# Altium PCB 219-05-2268.PcbDoc
Units mil, origin at the board's own origin, x right, y up, seen from the top; angles counter-clockwise.
Board outline 1800 x 1650 mil, 2 copper layers (Top Layer, Bottom Layer), stack 61.855 mil thick; 17 components, 11 nets, 65 pads, 6 vias.
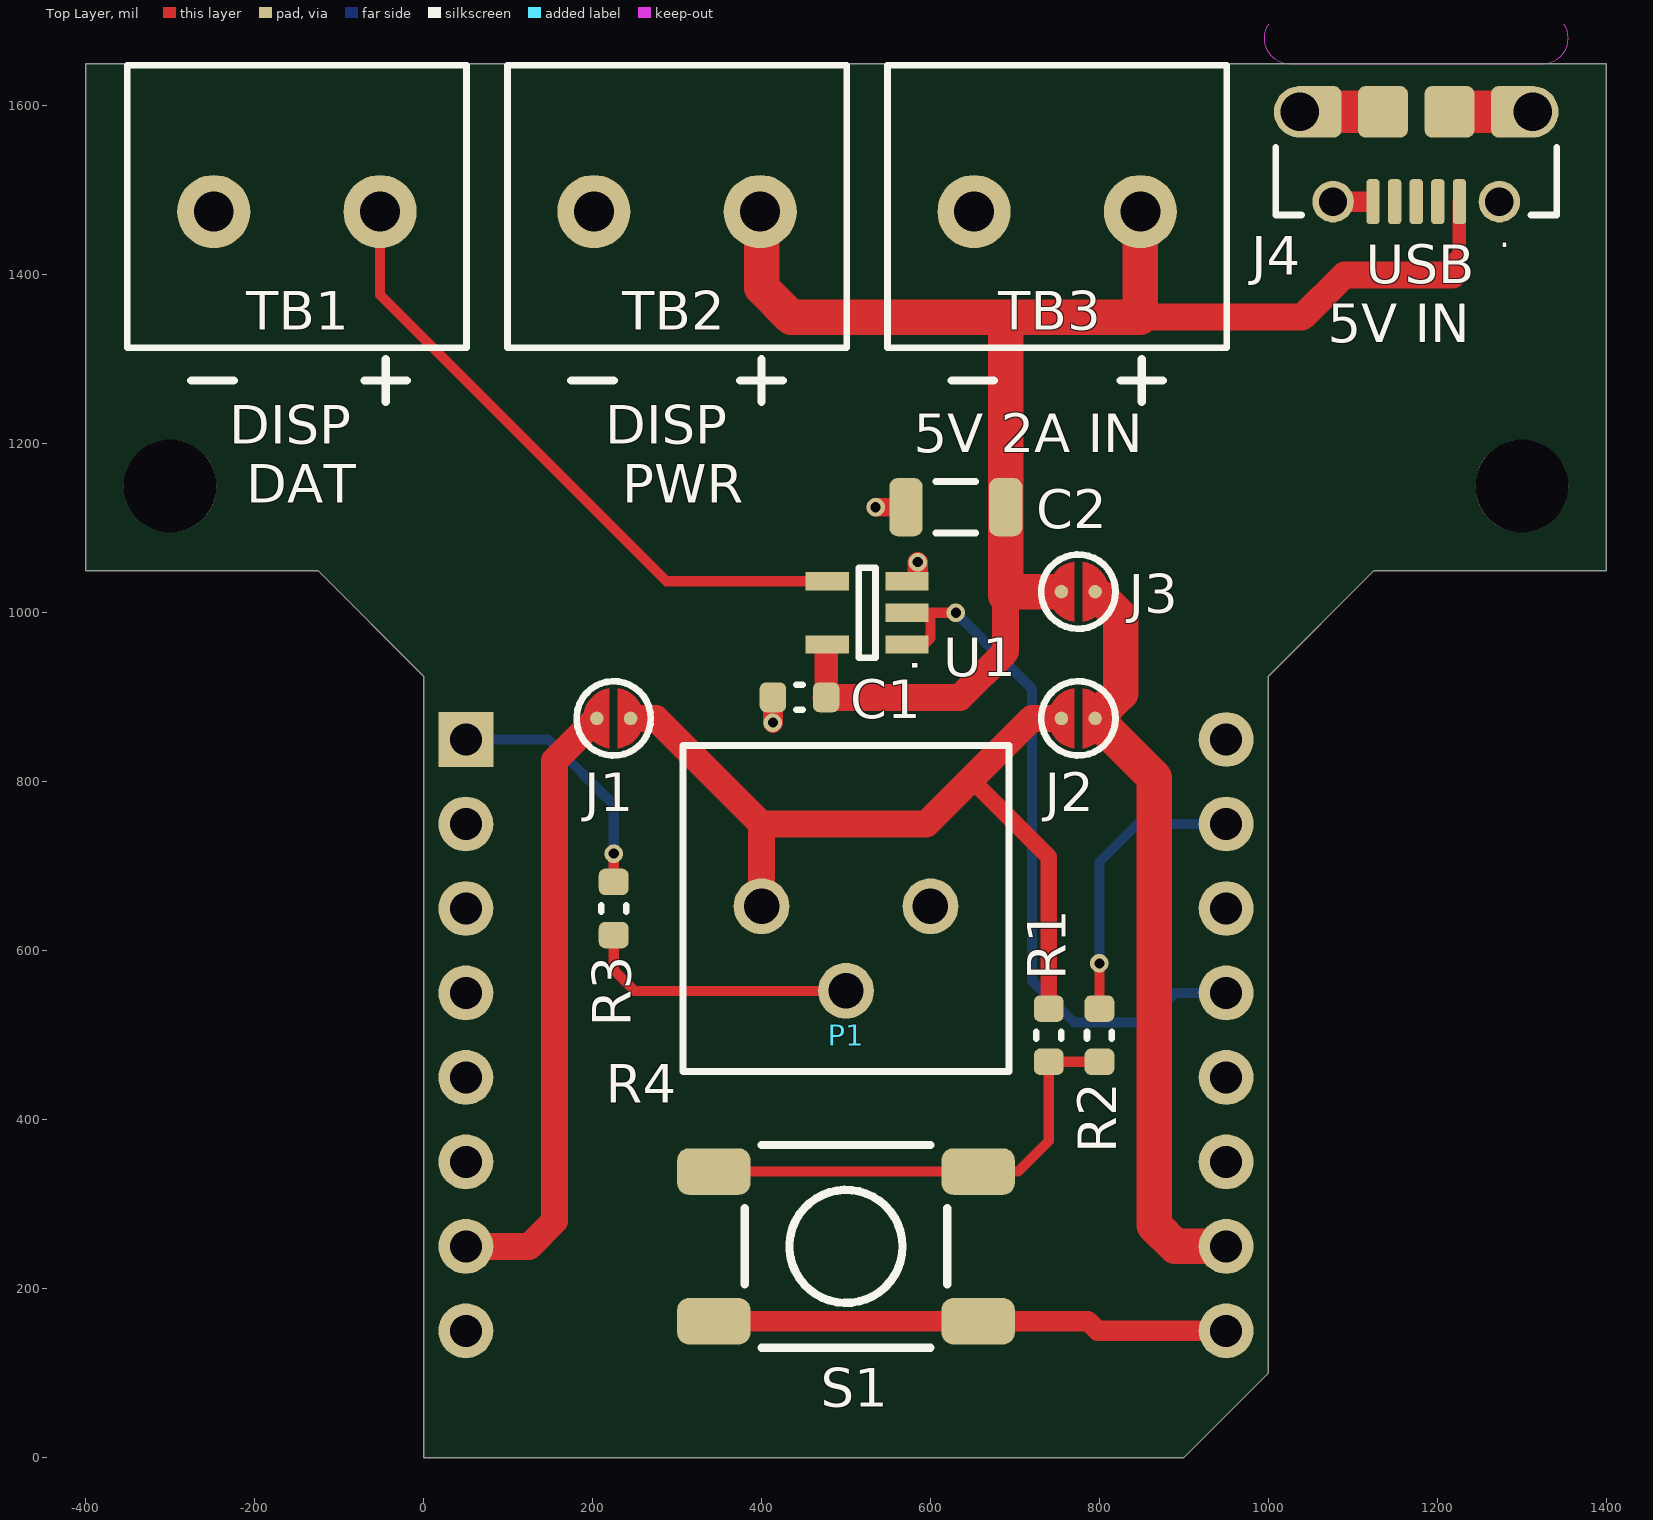
[diagram p0: Top Layer view]
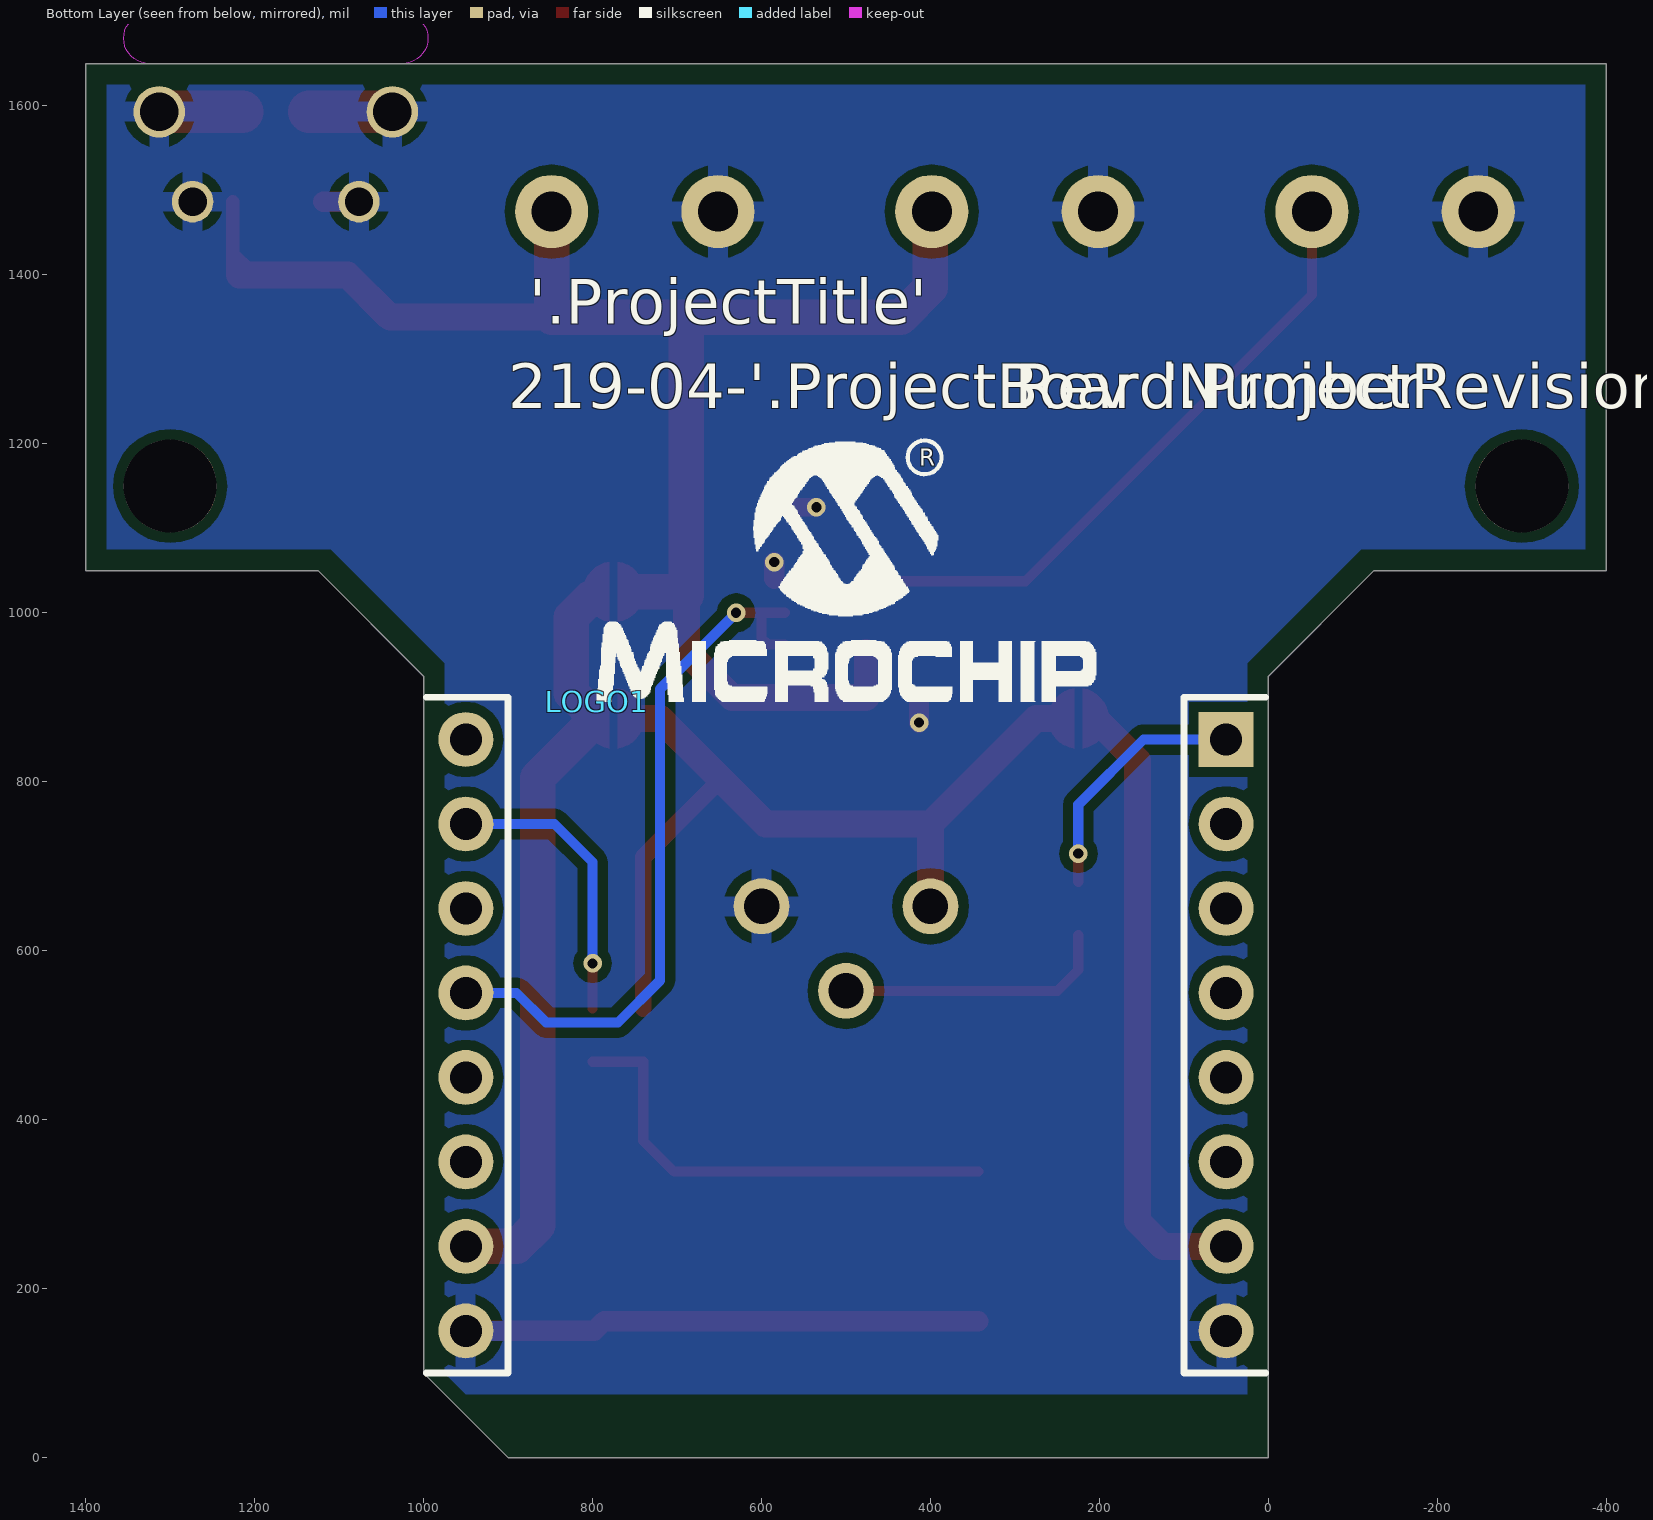
[diagram p1: Bottom Layer view, seen from below]
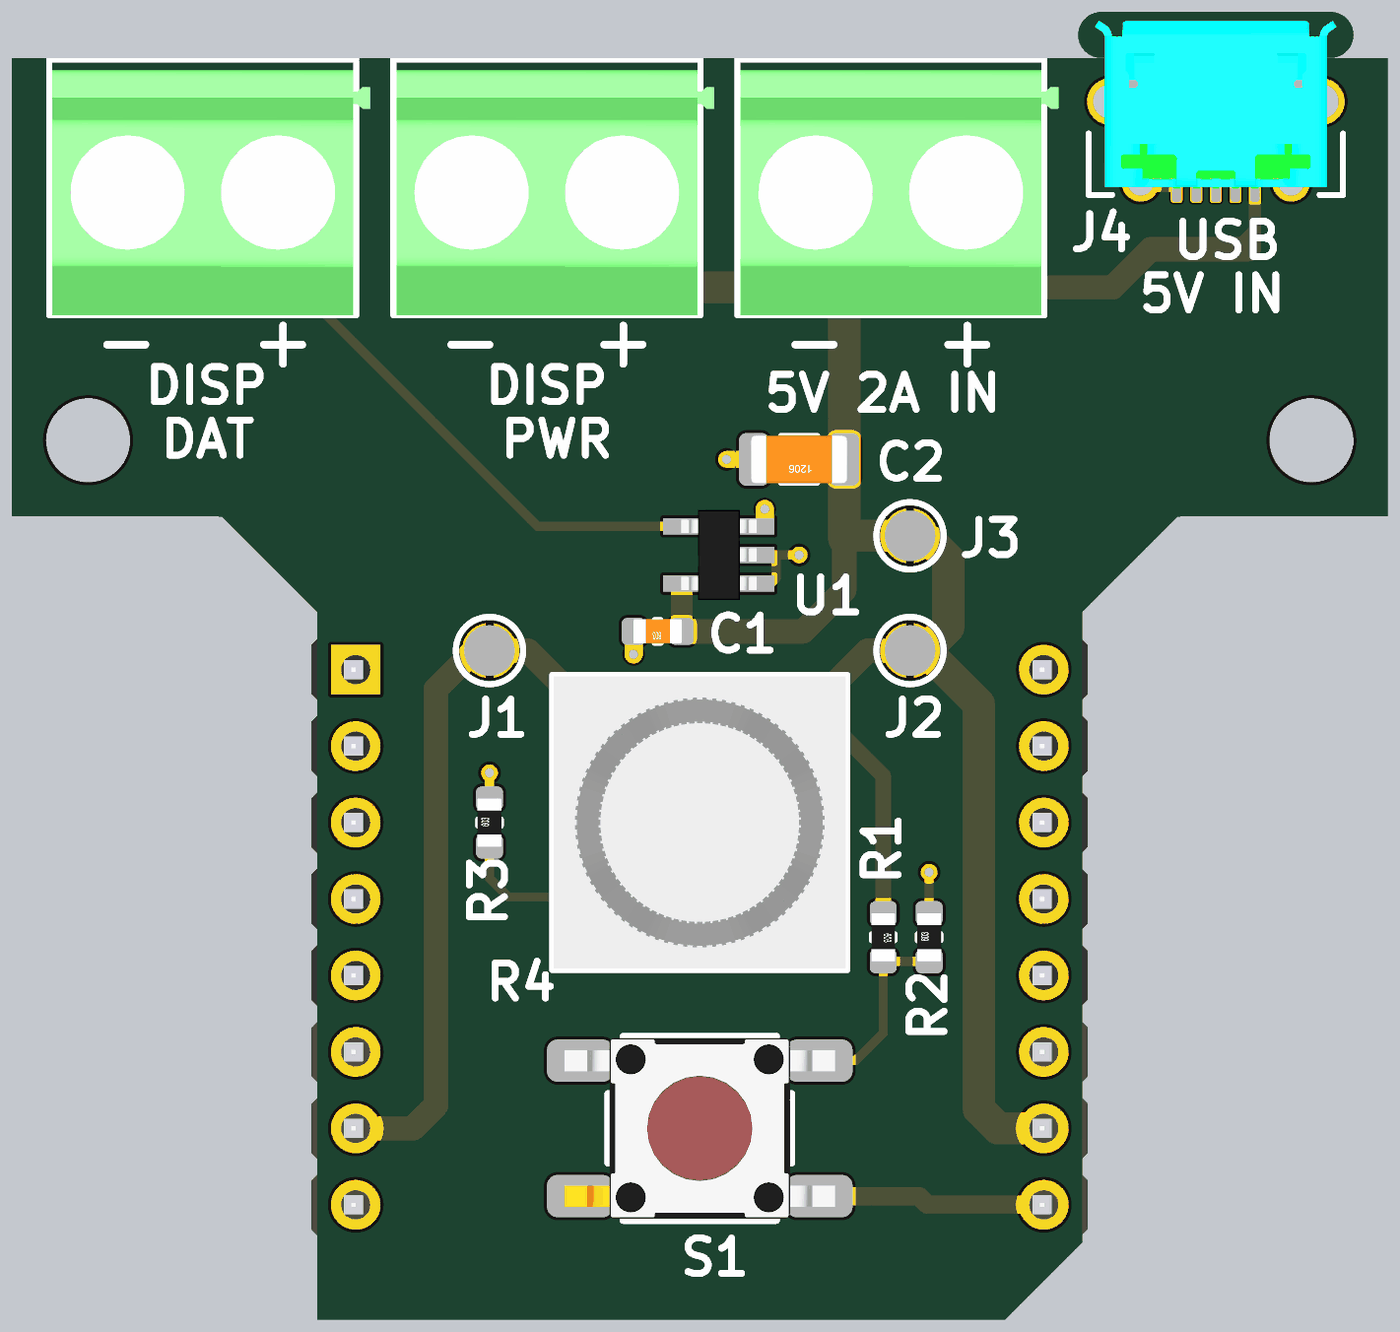
[diagram p2: 3D render of the assembled board from above, using the file's embedded part models]

## Layer stack, top to bottom
Top Solder: solder mask 0.4, Solder Resist, Dk 3.5
Top Layer: signal copper 1.4
Dielectric1: core 59.0551, FR-4, Dk 4.8
Bottom Layer: signal copper 1.4
Bottom Solder: solder mask 0.4, Solder Resist, Dk 3.5

## Board outline
0,925 -125,1050 -400,1050 -400,1650 1400,1650 1400,1050 1125,1050 1000,925 1000,100 900,0 0,0

## Design rules (kind name [scope] priority, off if disabled: settings)
Clearance "Net to Polygon 0.5mm" [InNet('5V') vs (IsRegion)] p1 off: gap=19.68 ignorepadtopadclearanceinfootprint=FALSE except(0: Arc-Hole Track-Hole SMDPad-Hole THPad-Hole Via-Hole Fill-Hole Poly-Hole Region-Hole Text-Hole)
Clearance [All] p2: gap=8 ignorepadtopadclearanceinfootprint=FALSE except(0: Arc-Hole Track-Hole SMDPad-Hole THPad-Hole Via-Hole Fill-Hole Poly-Hole Region-Hole Text-Hole; 5: Arc-Text Track-Text SMDPad-Text THPad-Text Via-Text Fill-Text Poly-Text Region-Text Text-Text; 6: Arc-SMDPad Track-SMDPad SMDPad-SMDPad; 12: Arc-Poly Track-Poly SMDPad-Poly THPad-Poly Via-Poly Fill-Poly Poly-Poly)
ComponentClearance [All] p1: gap=0 collisioncheckmode=3 verticalgap=0 showdistances=FALSE
DiffPairsRouting [All] p1: maxlimit=9 minlimit=9 mostfreqgap=9 toplayer_minwidth=9 toplayer_maxwidth=9 toplayer_prefwidth=9 bottomlayer_minwidth=9 bottomlayer_maxwidth=9 bottomlayer_prefwidth=9 maxuncoupledlength=500
FabricationTestPointUsage TestPointUsage [All] p1: valid=0 allowmultiple=FALSE
FabricationTestpoint Testpoint [All] p1: side=3 testpointundercomponent=TRUE minsize=40 maxsize=100 preferedsize=60 minholesize=0 maxholesize=40 preferedholesize=32 testpointgrid=1 allowsidetop=TRUE allowsidebottom=TRUE usegrid=TRUE gridtolerance=0.01
HoleSize [All] p1: absolutevalues=TRUE maxlimit=196.85 minlimit=11.81 maxpercent=80.000 minpercent=20.000
HoleToHoleClearance [All] p1: gap=11.81 allowstackedmicrovias=TRUE
MinimumSolderMaskSliver [All] p1 off: minsoldermaskwidth=7.87
PlaneClearance [All] p1: clearance=19.68
PlaneConnect PlaneConnect_full [IsVia] p1: planeconnectstyle=Direct reliefexpansion=19.68 reliefentries=4 reliefconductorwidth=11.81 reliefairgap=11.81
PlaneConnect [All] p2: planeconnectstyle=Relief reliefexpansion=11.81 reliefentries=4 reliefconductorwidth=9.84 reliefairgap=9.84
PolygonConnect PolygonConnect_full [All vs IsVia or IsNamedPolygon('full')] p1: connectstyle=Direct reliefconductorwidth=0 reliefentries=4 polygonreliefangle="90 Angle" airgapwidth=10
PolygonConnect [All] p2: connectstyle=Relief reliefconductorwidth=24 reliefentries=4 polygonreliefangle="90 Angle" airgapwidth=12
RoutingVias [All] p1: holewidth=15 width=30 viastyle="Through Hole" minholewidth=12 minwidth=22 maxholewidth=21 maxwidth=42
ShortCircuit [IsNet] p1: allowed=FALSE
SilkToBoardRegionClearance [All] p1 off:
SilkToSilkClearance [All] p1 off: silktosilkclearance=7.87
SilkToSolderMaskClearance SilkscreenOverComponentPads [IsPad] p1 off: minsilkscreentomaskgap=7.87 clearancetoexposedcopper=TRUE
SolderMaskExpansion [All] p1: expansion=3.94
Width [All] p1: maxlimit=100 minlimit=8 preferedwidth=12 checkconnectedcopper=TRUE
17 further rules are at their usual default settings.

## Components (designator, comment, footprint, x,y, rotation, side; value= is the part's Value field where it differs from the comment)
C1 "Capacitor NP" CAP_C_0603 445,900 r180 top value=0.1uF
C2 "Capacitor NP" CAP_C_1206 630,1125 r180 top value=10uF
J1 "JMPR_Solder" JMPR_SOLDER 225,875 r0 top
J2 "JMPR_Solder" JMPR_SOLDER 775,875 r180 top
J3 "JMPR_Solder" JMPR_SOLDER 775,1025 r180 top
J4 "CON USB2.0 Mini_Micro" CON_USB_Micro-AB_SMD_TH_RA_FCI_10118194-0001LF 1175,1593 r0 top locked value="USB2.0 MICRO-B"
LOGO1 "Logo_MCHP_Small" LOGO_MCHP_SMALL 795,895 r180 bottom
P1 "Module mikroBUS_Add-on_standard" MOD_mikroBUS_MINI 0,0 r0 top locked value=mikroBUS_Small
R1 "Resistor" RES_C_0603 740,500 r270 top value=10k
R2 "Resistor" RES_C_0603 800,500 r90 top value=1k
R3 "Resistor" RES_C_0603 225,650 r90 top value=1k
R4 "Resistor Var" RES_VAR_TTE_72PTRxxKLF_KNOB_L9.53W9.53H10.15 500,650 r0 top locked value=10k
S1 "Switch 4 Pin" SW_TACT_SMD_B3S-1000 500,250 r0 top locked value="PTS645SM43SMTR92 LFS"
TB1 "Header 1x2" CON_TERMINAL_5_1x2_TH_RA_PHO_1935161 -150,1475 r180 top locked value="TERMINAL 1x2"
TB2 "Header 1x2" CON_TERMINAL_5_1x2_TH_RA_PHO_1935161 300,1475 r180 top locked value="TERMINAL 1x2"
TB3 "Header 1x2" CON_TERMINAL_5_1x2_TH_RA_PHO_1935161 750,1475 r180 top locked value="TERMINAL 1x2"
U1 "74XX1G08_9 SOT-23-5" SOT-23-5 525,1000 r90 top value=74AHCT1G08

## Footprints (in the part's own frame and the unit in brackets; to place one, negate y for a bottom-side part, rotate by r counter-clockwise, add the part's x,y. Pads: shape width x height; smd on the part's side, far side on the other; paste and mask are expansions set on the pad)
CAP_C_0603 [mm] "Chip Capacitor, 2-Leads, Body 1.6x0.8mm, IPC Medium Density"
  rrect50% 0.8x0.9 smd: 1(-0.8,0) 2(0.8,0)
  silkscreen extent -0.1,-0.38 0.1,0.38, body extent -0.8,-0.4 0.8,0.4, height 0.3
CAP_C_1206 [mm] "Chip Capacitor, 2-Leads, Body 3.2x1.6mm, IPC Medium Density"
  rrect50% 1x1.75 smd: 1(-1.5,0) 2(1.5,0)
  silkscreen extent -0.6,-0.77 0.6,0.77, body extent -1.6,-0.8 1.6,0.8, height 1
CON_TERMINAL_5_1x2_TH_RA_PHO_1935161 [mm] "TERMINAL BLOCK 5.08MM 2POS PCB"
  round 2.2 hole 1.2: 1(-2.5,0) 2(2.5,0)
  silkscreen extent -5.1,-4.4 5.1,4.1, body extent -5.57,-4.05 5,4.1, height 10
CON_USB_Micro-AB_SMD_TH_RA_FCI_10118194-0001LF [mm] "FCI USB Micro-AB SMD RA L5W8.8H2.8"
  round 1.55 hole 1.15: 0(-3.505,0) 0(3.505,0)
  rrect30% 1.5x1.55 smd paste-0.051: 0(-3,0) 0(-1,0) 0(1,0) 0(3,0)
  round 1.25 hole 0.85: 0(-2.5,-2.7)
  rrect100% 1.25x1.25 hole 0.85: 0(2.5,-2.7)
  rrect50% 0.4x1.35 smd paste-0.046 mask+0.05: 1(1.3,-2.7) 2(0.65,-2.7) 3(0,-2.7) 4(-0.65,-2.7) 5(-1.3,-2.7)
  Keep-Out Layer board cut-out: 3.81,1.452 4.102,1.51 4.349,1.675 4.514,1.922 4.572,2.214 4.572,2.214 4.514,2.505 4.349,2.753 4.102,2.918 3.81,2.976 3.81,2.976 -3.81,2.976 -4.102,2.918 -4.349,2.753 -4.514,2.505 -4.572,2.214 -4.572,2.214 -4.514,1.922 -4.349,1.675 -4.102,1.51 -3.81,1.452 -3.81,1.452
  Keep-Out Layer board cut-out: 3.81,1.452 4.102,1.51 4.349,1.675 4.514,1.922 4.572,2.214 4.572,2.214 4.514,2.505 4.349,2.753 4.102,2.918 3.81,2.976 3.81,2.976 -3.81,2.976 -4.102,2.918 -4.349,2.753 -4.514,2.505 -4.572,2.214 -4.572,2.214 -4.514,1.922 -4.349,1.675 -4.102,1.51 -3.81,1.452 -3.81,1.452
  silkscreen extent -4.22,-3.1 4.23,-1.07, body extent -4.02,-2.89 4.02,2.69, height 2.74
JMPR_SOLDER [mil] "SMT pads only"
  round 16 smd paste-16: 1(-20,0) 2(20,0)
  Top Layer region: 5.09,-35.64 20.86,-29.34 31.99,-16.51 36,0 31.99,16.51 20.86,29.34 5.09,35.64 5.09,35.64
  Top Layer region: -5.09,-35.64 -20.86,-29.34 -31.99,-16.51 -36,0 -31.99,16.51 -20.86,29.34 -5.09,35.64 -5.09,35.64
  Top Layer region: 5,33
  Top Layer region: -5,33
  silkscreen extent -44,-44 44,44
LOGO_MCHP_SMALL [mil]
  silkscreen extent 0,0 591,309
MOD_mikroBUS_MINI [mil] "MIKRO_BUS_MINI"
  rect 65x65 hole 38: 1(50,850)
  round 65 hole 38: 2(50,750) 3(50,650) 4(50,550) 5(50,450) 6(50,350) 7(50,250) 8(50,150) 9(950,150) 10(950,250) 11(950,350) 12(950,450) 13(950,550) 14(950,650) 15(950,750) 16(950,850)
  body extent -8,100 1007,900, height 82
RES_C_0603 [mm] "Chip Resistor, 2-Leads, Body 1.6x0.8mm, IPC Medium Density"
  rrect50% 0.8x0.9 smd: 1(-0.8,0) 2(0.8,0)
  silkscreen extent -0.1,-0.38 0.1,0.38, body extent -0.8,-0.4 0.8,0.4, height 0.3
RES_VAR_TTE_72PTRxxKLF_KNOB_L9.53W9.53H10.15 [mil] "Potentiometer TT Electronics 72PTR10KLF"
  round 66 hole 42: 1(-100,2.5) 2(0,-97.5) 3(100,2.5)
  silkscreen extent -193,-193 193,193, body extent -191,-191 191,191, height 392
SOT-23-5 [mm] "SOT-23-5"
  rect 0.55x1.3 smd: 1(-0.95,-1.2) 2(0,-1.2) 3(0.95,-1.2) 4(0.95,1.2) 5(-0.95,1.2)
  silkscreen extent -1.35,-0.25 1.35,0.25, body extent -1.5,-1.25 1.5,1.25, height 1.08
SW_TACT_SMD_B3S-1000 [mm] "Switch Tact B3S-1000 / B3S-1002 L=6mm W=6.6mm H=4.3mm"
  rrect50% 2.2x1.4 smd: 1(3.975,-2.25) 2(-3.975,-2.25) 3(3.975,2.25) 4(-3.975,2.25)
  silkscreen extent -3.05,-3.05 3.05,3.05, body extent -4.5,-3 4.5,3, height 5

## Part data
C1: library part CAP0455, "Capacitor", Manufacturer 1=AVX, Manufacturer 2=Murata, Manufacturer 3=Panasonic, Manufacturer 4=TDK, Manufacturer 5=Yageo, Manufacturer Part Number 1=06035G104ZAT2A, Manufacturer Part Number 2=GRM188F51H104ZA01D, Manufacturer Part Number 3=ECJ-1VF1H104Z, Manufacturer Part Number 4=C1608Y5V1H104Z, Manufacturer Part Number 5=CC0603ZRY5V9BB104, Operating Temperature="-30C to +85C", Package=0603, Supplier Part Number 1=478-3724-1-ND, Temperature Coeffcient=Y5V, Tolerance=20%, Voltage=50V, Category=Capacitor, ComponentLink1Description="SVN Datasheet", ComponentLink1URL=https://chn-vm-apps.microchip.com/mchprepo/parts/Datasheets/ECJ__General_.pdf, ComponentLink2Description="Local Datasheet", ComponentLink2URL=C:\ALTIUM_WORK\00001_MCHP-CDB\Datasheets\ECJ__General_.pdf, ComponentLink3Description="Open Symbol", ComponentLink3URL="C:\ALTIUM_WORK\00001_MCHP-CDB\Library\LibraryRefs\Capacitor NP.SchLib", ComponentLink4Description="Open Footprint", ComponentLink4URL=C:\ALTIUM_WORK\00001_MCHP-CDB\Library\Footprints\CAP_C_0603.PcbLib, ComponentLink5Description="Open Footprint 2", ComponentLink6Description="Open Footprint 3", ComponentLink7Description="Open Footprint 4", Description_="CAP CER 0.1uF 50V 20% Y5V SMD 0603", Dev Tools Status=Production, MCHP-ID=CAP0455, Populated=Yes, Quantity Override=1, Revision=1, Status="MCL Design", Supplier 1=Digi-Key, Supplier 2=Digi-Key, Supplier 3=Digi-Key, Supplier 4=Digi-Key, Supplier 5=Digi-Key, Supplier 6=Digi-Key, Supplier Part Number 2=490-1568-2-ND, Supplier Part Number 3=PCC2153CT-ND, Supplier Part Number 4=445-1324-1-ND, Supplier Part Number 5=311-1343-2-ND, Supplier Part Number 6=311-1343-6-ND, Symbol="Capacitor NP", Type=Ceramic
C2: library part CAP0623, "Capacitor", Manufacturer 1=KEMET, Manufacturer 2=TDK, Manufacturer 3="AVX Corporation", Manufacturer Part Number 1=C1206C106K4PACTU, Manufacturer Part Number 2=C3216X5R1C106K, Manufacturer Part Number 3=1206YD106KAT2A, Operating Temperature="-55C to +85C", Package=1206, Supplier Part Number 1=399-5091-1-ND, Temperature Coeffcient=X5R, Tolerance=10%, Voltage=16V, Category=Capacitor, ComponentLink1Description="SVN Datasheet", ComponentLink1URL=https://chn-vm-apps.microchip.com/mchprepo/parts/Datasheets/general_B11.pdf, ComponentLink2Description="Local Datasheet", ComponentLink2URL=C:\ALTIUM_WORK\00001_MCHP-CDB\Datasheets\general_B11.pdf, ComponentLink3Description="Open Symbol", ComponentLink3URL="C:\ALTIUM_WORK\00001_MCHP-CDB\Library\LibraryRefs\Capacitor NP.SchLib", ComponentLink4Description="Open Footprint", ComponentLink4URL=C:\ALTIUM_WORK\00001_MCHP-CDB\Library\Footprints\CAP_C_1206.PcbLib, ComponentLink5Description="Open Footprint 2", ComponentLink6Description="Open Footprint 3", ComponentLink7Description="Open Footprint 4", Description_="CAP CER 10uF 16V 10% X5R SMD 1206", Dev Tools Status=Production, MCHP-ID=CAP0623, Populated=Yes, Quantity Override=1, Revision=1, Status="MCL Design", Supplier 1=Digi-Key, Supplier 2=Digi-Key, Supplier 3=Digi-Key, Supplier Part Number 2=445-4052-1-ND, Supplier Part Number 3=478-1573-1-ND, Symbol="Capacitor NP", Type=Ceramic
J1 J2 J3: "Jumper, Solder Blob Shorting"
J4: library part CON1383, Manufacturer 1=FCI, Manufacturer 2=YangMing, Manufacturer Part Number 1=10118194-0001LF, Manufacturer Part Number 2=YM-02-363-N05F, Supplier Part Number 1=609-4618-1-ND, Category=Connector, ComponentLink1Description="SVN Datasheet", ComponentLink1URL=https://chn-vm-apps.microchip.com/mchprepo/parts/Datasheets/10118194.pdf, ComponentLink2Description="Local Datasheet", ComponentLink2URL=C:\ALTIUM_WORK\00001_MCHP-CDB\Datasheets\10118194.pdf, ComponentLink3Description="Open Symbol", ComponentLink3URL="C:\ALTIUM_WORK\00001_MCHP-CDB\Library\LibraryRefs\CON USB2.0 Mini_Micro.SchLib", ComponentLink4Description="Open Footprint", ComponentLink4URL=C:\ALTIUM_WORK\00001_MCHP-CDB\Library\Footprints\CON_USB_Micro-AB_SMD_TH_RA_FCI_10118194-0001LF.PcbLib, ComponentLink5Description="Open Footprint 2", ComponentLink6Description="Open Footprint 3", ComponentLink7Description="Open Footprint 4", Description_="CON USB2.0 MICRO-B FEMALE TH/SMD R/A", Dev Tools Status=Production, MCHP-ID=CON1383, Owner="Jamus Griego", Populated=YES, Quantity Override=1, Revision=1, Status="MCL Design", Supplier 1=Digi-Key, Supplier 2=Raynen, Supplier Part Number 2="YangMing YM-02-363-N05F", Symbol="CON USB2.0 Mini_Micro", Type=USB
LOGO1: "Microchip Logo for PCB Silkscreen"
P1: library part CON1406, "mikroBUS Target Header", Category=Connector, ComponentLink1Description="SVN Datasheet", ComponentLink1URL=https://chn-vm-apps.microchip.com/mchprepo/parts/Datasheets/mikrobus_specification_standard.pdf, ComponentLink2Description="Local Datasheet", ComponentLink2URL=C:\ALTIUM_WORK\00001_MCHP-CDB\Datasheets\mikrobus_specification_standard.pdf, ComponentLink3Description="Open Symbol", ComponentLink3URL="C:\ALTIUM_WORK\00001_MCHP-CDB\Library\LibraryRefs\Module mikroBUS_Add-on_standard.SchLib", ComponentLink4Description="Open Footprint", ComponentLink4URL=C:\ALTIUM_WORK\00001_MCHP-CDB\Library\Footprints\MOD_mikroBUS_MINI.PcbLib, ComponentLink5Description="Open Footprint 2", ComponentLink6Description="Open Footprint 3", ComponentLink7Description="Open Footprint 4", Description_="Mikro BUS add-on Small Bd", Dev Tools Status=Design, MCHP-ID=CON1406, Owner="Jose Garcia", Populated=YES, Quantity Override=1, Revision=1, Status="MCL Design", Symbol="Module mikroBUS_Add-on_standard", Type=Modular
R1: library part RSMT0139, Manufacturer 1=Panasonic, Manufacturer 2="Stackpole Electronics Inc", Manufacturer 4=Yageo, Manufacturer 5=Xicon, Manufacturer 6="NIC Components", Manufacturer Part Number 1=ERJ-3EKF1002V, Manufacturer Part Number 2=RMCF0603FT10K0, Manufacturer Part Number 3="RMCF 1/16 10K 1% R", Manufacturer Part Number 4=RC0603FR-0710KL, Manufacturer Part Number 5=302-10K-RC, Manufacturer Part Number 6=NRC06F1002TRF, Operating Temperature="-55C to +155C", Package=0603, Power=1/10W, Supplier Part Number 1=P10.0KHCT-ND, Temperature Coeffcient=100ppm/C, Tolerance=1%, Category=Resistor, ComponentLink1Description="SVN Datasheet", ComponentLink1URL=https://chn-vm-apps.microchip.com/mchprepo/parts/Datasheets/nrc.pdf, ComponentLink2Description="Local Datasheet", ComponentLink2URL=C:\ALTIUM_WORK\00001_MCHP-CDB\Datasheets\nrc.pdf, ComponentLink3Description="Open Symbol", ComponentLink3URL=C:\ALTIUM_WORK\00001_MCHP-CDB\Library\LibraryRefs\Resistor.SchLib, ComponentLink4Description="Open Footprint", ComponentLink4URL=C:\ALTIUM_WORK\00001_MCHP-CDB\Library\Footprints\RES_C_0603.PcbLib, ComponentLink5Description="Open Footprint 2", ComponentLink6Description="Open Footprint 3", ComponentLink7Description="Open Footprint 4", Composition=TKF, Description_="RES TKF 10k 1% 1/10W SMD 0603", Dev Tools Status=Production, Manufacturer 3="Stackpole Electronics Inc", MCHP-ID=RSMT0139, Populated=Yes, Quantity Override=1, Revision=2, Status="MCL Design", Supplier 1=Digi-Key, Supplier 2=Digi-Key, Supplier 3=Digi-Key, Supplier 4=Digi-Key, Supplier 5=Mouser, Supplier 6="NIC Components", Supplier Part Number 2=RMCF1/1610KFRTR-ND, Supplier Part Number 3=RMCF0603FT10K0TR-ND, Supplier Part Number 4=311-10.0KHRCT-ND, Supplier Part Number 5=302-10k-RC, Supplier Part Number 6=NRC06F1002TRF, Symbol=Resistor, Type="RES SMD"
R2 R3: library part RSMT0138, Manufacturer 1=Panasonic, Manufacturer 2=ROHM, Manufacturer 3="Stackpole Electronics Inc", Manufacturer 5=Vishay, Manufacturer 7=Yageo, Manufacturer 8="TE Connectivity", Manufacturer Part Number 1=ERJ-3EKF1001V, Manufacturer Part Number 2=MCR03EZPFX1001, Manufacturer Part Number 3=RMCF0603FT1K00, Manufacturer Part Number 4="RMCF 1/16 1K 1% R", Manufacturer Part Number 5=CRCW06031K00FKEA, Manufacturer Part Number 6=RMCF1/161.0K1%TR, Manufacturer Part Number 7=RC0603FR-071KL, Manufacturer Part Number 8=1622866-1, Operating Temperature="-55C to +155C", Package=0603, Power=1/10W, Supplier Part Number 1=P1.00KHCT-ND, Temperature Coeffcient=100ppm/C, Tolerance=1%, Voltage=75V, Category=Resistor, ComponentLink1Description="SVN Datasheet", ComponentLink1URL=https://chn-vm-apps.microchip.com/mchprepo/parts/Datasheets/AOA0000CE2.pdf, ComponentLink2Description="Local Datasheet", ComponentLink2URL=C:\ALTIUM_WORK\00001_MCHP-CDB\Datasheets\AOA0000CE2.pdf, ComponentLink3Description="Open Symbol", ComponentLink3URL=C:\ALTIUM_WORK\00001_MCHP-CDB\Library\LibraryRefs\Resistor.SchLib, ComponentLink4Description="Open Footprint", ComponentLink4URL=C:\ALTIUM_WORK\00001_MCHP-CDB\Library\Footprints\RES_C_0603.PcbLib, ComponentLink5Description="Open Footprint 2", ComponentLink6Description="Open Footprint 3", ComponentLink7Description="Open Footprint 4", Composition=TKF, Description_="RES TKF 1k 1% 1/10W SMD 0603", Dev Tools Status=Production, Manufacturer 4="Stackpole Electronics Inc", Manufacturer 6="Stackpole Electronics Inc", MCHP-ID=RSMT0138, Populated=Yes, Quantity Override=1, Revision=2, Status="MCL Design", Supplier 1=Digi-Key, Supplier 2=Digi-Key, Supplier 3=Digi-Key, Supplier 4=Digi-Key, Supplier 5=Digi-Key, Supplier 6=Newark, Supplier 7="Stackpole Electronics Inc", Supplier 8=Digi-Key, Supplier 9=Digi-Key, Supplier Part Number 2=P1.00KHTR-ND, Supplier Part Number 3=RHM1.00KHCT-ND, Supplier Part Number 4=RMCF1/161KFRTR-ND, Supplier Part Number 5=RMCF0603FT1K00TR-ND, Supplier Part Number 6=52K8015, Supplier Part Number 7=RMCF1/161.0K1%TR, Supplier Part Number 8=311-1.00KHRCT-ND, Supplier Part Number 9=A106049CT-ND, Symbol=Resistor, Type="RES SMD"
R4: library part RES1583, Manufacturer 1="TT Electronics/BI                                                                               TT Electronics/BI", Manufacturer Part Number 1=72PTR10KLF, Power=1/2W, Supplier Part Number 1=987-1534-ND, Tolerance=10%, Category=Resistor, ComponentLink1Description="SVN Datasheet", ComponentLink1URL=https://chn-vm-apps.microchip.com/mchprepo/parts/Datasheets/Datasheet, ComponentLink2Description="Local Datasheet", ComponentLink2URL=C:\ALTIUM_WORK\00001_MCHP-CDB\Datasheets\Datasheet, ComponentLink3Description="Open Symbol", ComponentLink3URL="C:\ALTIUM_WORK\00001_MCHP-CDB\Library\LibraryRefs\Resistor VAR.SchLib", ComponentLink4Description="Open Footprint", ComponentLink4URL=C:\ALTIUM_WORK\00001_MCHP-CDB\Library\Footprints\RES_VAR_TTE_72PTRxxKLF_KNOB_L9.53W9.53H10.15.PcbLib, ComponentLink5Description="Open Footprint 2", ComponentLink6Description="Open Footprint 3", ComponentLink7Description="Open Footprint 4", Description_="RES VARIABLE C 10K 10% 1/2W TH 72PTR10KLF Knob", Dev Tools Status=Production, MCHP-ID=RES1583, Owner="Mark Loper", Populated=YES, Quantity Override=1, Revision=1, Status="MCL Design", Supplier 1=Digi-Key, Symbol="Resistor VAR", Type=Trimmer
S1: library part SWITCH1046, "Switch", Manufacturer 1="Wurth Electronics Inc", Manufacturer 2="C&K Components", Manufacturer 3=SWITECH, Manufacturer Part Number 1=430182043816, Manufacturer Part Number 2="PTS645SM43SMTR92 LFS", Manufacturer Part Number 3=TS2A-043C-G9, Supplier Part Number 1=732-7004-1-ND, Category=Switch, ComponentLink1Description="SVN Datasheet", ComponentLink1URL=https://chn-vm-apps.microchip.com/mchprepo/parts/Datasheets/PTS645_17dec14.pdf, ComponentLink2Description="Local Datasheet", ComponentLink2URL=C:\ALTIUM_WORK\00001_MCHP-CDB\Datasheets\PTS645_17dec14.pdf, ComponentLink3Description="Open Symbol", ComponentLink3URL="C:\ALTIUM_WORK\00001_MCHP-CDB\Library\LibraryRefs\Switch 4 Pin.SchLib", ComponentLink4Description="Open Footprint", ComponentLink4URL=C:\ALTIUM_WORK\00001_MCHP-CDB\Library\Footprints\SW_TACT_SMD_B3S-1000.PcbLib, ComponentLink5Description="Open Footprint 2", ComponentLink6Description="Open Footprint 3", ComponentLink7Description="Open Footprint 4", Description_="SWITCH TACT SPST 12V 50mA PTS645SM43SMTR92 LFS SMD", Dev Tools Status=Production, MCHP-ID=SWITCH1046, Owner="Jamus Griego", Populated=YES, Quantity Override=1, Revision=1, Status="MCL Design", Supplier 1=Digi-Key, Supplier 2=Digi-Key, Supplier 3=Raynen, Supplier Part Number 2=CKN9112CT-ND, Supplier Part Number 3="SWITECH TS2A-043C-G9", Symbol="Switch 4 Pin", Type=Tactile
TB1 TB2 TB3: library part CON0287, Current=18A, Manufacturer 1="Phoenix Contact", Manufacturer Part Number 1=1935161, Supplier Part Number 1=277-1667-ND, Voltage=300V, Category=Connector, ComponentLink1Description="SVN Datasheet", ComponentLink1URL=https://chn-vm-apps.microchip.com/mchprepo/parts/Datasheets/1935161.pdf, ComponentLink2Description="Local Datasheet", ComponentLink2URL=C:\ALTIUM_WORK\00001_MCHP-CDB\Datasheets\1935161.pdf, ComponentLink3Description="Open Symbol", ComponentLink3URL="C:\ALTIUM_WORK\00001_MCHP-CDB\Library\LibraryRefs\Header 1x2.SchLib", ComponentLink4Description="Open Footprint", ComponentLink4URL=C:\ALTIUM_WORK\00001_MCHP-CDB\Library\Footprints\CON_TERMINAL_5_1x2_TH_RA_PHO_1935161.PcbLib, ComponentLink5Description="Open Footprint 2", ComponentLink6Description="Open Footprint 3", ComponentLink7Description="Open Footprint 4", Description_="CON TERMINAL 5mm 1x2 Female 12-26AWG 18A TH R/A", Dev Tools Status=Production, MCHP-ID=CON0287, Owner="Stephen Humberd", Populated=YES, Quantity Override=1, Revision=1, Status="MCL Design", Supplier 1=Digi-Key, Symbol="Header 1x2", Type="Terminal Block"
U1: library part IC00097, "Gate AND", Manufacturer 1="Texas Instruments", Manufacturer Part Number 1=SN74AHCT1G08DBVR, Operating Temperature="-40C to +85C", Package=SOT-23-5, Supplier Part Number 1=296-1113-1-ND, Category=IC, ComponentLink1Description="SVN Datasheet", ComponentLink1URL=https://chn-vm-apps.microchip.com/mchprepo/parts/Datasheets/sn74ahct1g08.pdf, ComponentLink2Description="Local Datasheet", ComponentLink2URL=C:\ALTIUM_WORK\00001_MCHP-CDB\Datasheets\sn74ahct1g08.pdf, ComponentLink3Description="Open Symbol", ComponentLink3URL="C:\ALTIUM_WORK\00001_MCHP-CDB\Library\LibraryRefs\74XX1G08_9 SOT-23-5.SchLib", ComponentLink4Description="Open Footprint", ComponentLink4URL=C:\ALTIUM_WORK\00001_MCHP-CDB\Library\Footprints\SOT-23-5.PcbLib, ComponentLink5Description="Open Footprint 2", ComponentLink6Description="Open Footprint 3", ComponentLink7Description="Open Footprint 4", Description_="IC LOGIC 74AHCT1G08 SINGLE 2-INPUT AND GATE SOT-23-5", Dev Tools Status=Production, MCHP-ID=IC00097, Populated=YES, Quantity Override=1, Revision=1, Status="MCL Design", Supplier 1=Digi-Key, Symbol="74XX1G08_9 SOT-23-5", Type=Logic

## Free pads (board coordinates)
  round 110 hole 110 unplated: 0(-300,1150) 0(1300,1150)

## Via types
v1: diameter 22, hole 12, Top Layer to Bottom Layer, 6 vias

## Nets (pads, with @x,y where several pads share a name; then routed paths per layer and width w, separated by ;. In a path a pad name is that pad's centre, name@x,y a point inside that pad or via, vN(x,y) a via of type N, cw(c..) or ccw(c..) an arc to the next point about the centre after c; other vN are vias at no path point)
+5V: C1.1 C2.1 J3.2 J4.1 TB2.1 TB3.1 U1.5 | length 1901.1
  Top Layer w16: 1226.18,1400 J4.1
  Top Layer w28: C1.1@476.5,898.5 C1.1 U1.5@476.5,955
  Top Layer w32: TB2.1 TB2.1@400,1473.43 ; C1.1 635,900 689.06,954.06 689.06,1020.69 693.36,1025 ; 689.06,1349.06 690,1350 ; 848.43,1350 1040,1350 1090,1400 1218,1400
  Top Layer w42: TB2.1@400,1473.43 400,1385 435,1350 690,1350 848.43,1350 TB3.1 ; 689.06,1020.69 C2.1 689.06,1349.06 ; 693.36,1025 739,1025 745,1025
GND: C1.2 C2.2 J4.0 J4.5 P1.8 P1.9 R4.3 S1.1 S1.2 TB1.2 TB2.2 TB3.2 U1.3 | length 936.9
  Top Layer w22: v1(535,1125) C2.2
  Top Layer w24: S1.2 S1.1 786.58,161.42 798,150 P1.9 ; v1(413.5,870) C1.2 ; U1.3@585,1040 v1(585,1060) ; J4.0@1076.57,1486.7 J4.5@1119,1486.7
  Top Layer w50: J4.0@1037,1593 1056.89,1593 J4.0@1135.63,1593 ; J4.0@1214.37,1593 1293.11,1593 J4.0@1313,1593
NetJ1_1: J1.1 P1.7 | length 726.1
  Top Layer w32: P1.7 125,250 155,280 155,825 191.59,861.59 J1.1@200,870
NetJ2_1: J2.1 J3.1 P1.10 | length 850
  Top Layer w42: 803,1017 808.41,1011.59 825,995 825,905 808.41,888.41 ; 808.41,861.59 865,805 865,275 890,250 P1.10
NetP1_1: P1.1 R3.2 | length 298.3
  Top Layer w12: R3.2 v1(225,715)
  Bottom Layer w12: P1.1 147.91,850 225,772.91 v1(225,715)
NetP1_13: P1.13 U1.1 U1.2 | length 856.5
  Top Layer w12: U1.1 592.6,962.6 600,970 600,998.88 601.12,1000 ; U1.2 601.12,1000 ; v1(630,1000) 601.12,1000
  Bottom Layer w12: v1(630,1000) 720,910 720,565 770,515 855,515 890,550 P1.13
NetP1_15: P1.15 R2.2 | length 342.1
  Top Layer w12: R2.2 v1(800,585)
  Bottom Layer w12: v1(800,585) 800,705 845,750 P1.15
NetR1_2: R1.2 R2.1 S1.3 S1.4 | length 565.2
  Top Layer w12: S1.4 S1.3 703.82,338.58 740,374.76 R1.2 R2.1
NetR3_1: R3.1 R4.2 | length 326.5
  Top Layer w12: R3.1 225,577.22 249.72,552.5 R4.2
NetTB1_1: TB1.1 U1.4 | length 768.2
  Top Layer w12: TB1.1 -51.57,1376.57 287.6,1037.4 U1.4
VDD: J1.2 J2.2 R1.1 R4.1 | length 1010.7
  Top Layer w20: 648,803 740,711 R1.1
  Top Layer w32: J1.2@250,875 275,875 400,750 ; R4.1 400,750 ; J2.2@750,875 720,875 648,803 595,750 400,750
pads on no net: J4.2 J4.3 J4.4 P1.2 P1.3 P1.4 P1.5 P1.6 P1.11 P1.12 P1.14 P1.16

## Polygon pours and split planes (outlines as drawn)
GND on Bottom Layer "BotGnd" (solid, remove dead copper, pour order 6): 25,75 25,940 -110,1075 -375,1075 -375,1625 1375,1625 1375,1075 1110,1075 975,940 975,100 950,75

## Other copper
Top Layer:
  region net +5V: 1220,1430 1200,1410 1220,1410
  text "'.Layer_Name'" at -300,1775 h120
Bottom Layer:
  text "'.Layer_Name'" at -300,1775 h120

## Silkscreen, mask and mechanical layers (free items; w line width, h text height)
Top Overlay:
  lines w10: -275,1275 -225,1275 ; -70,1275 -20,1275 ; -45,1250 -45,1300 ; 175,1275 225,1275 ; 375,1275 425,1275 ; 400,1250 400,1300 ; 625,1275 675,1275 ; 825,1275 875,1275 ; 850,1250 850,1300
  text "'.Layer_Name'" at -300,1775 h120
  text "USB" at 1115,1390 h46
  text "5V IN" at 1070,1320 h46
  text "DISP" at -230,1200 h46
  text "DISP" at 215,1200 h46
  text "5V 2A IN" at 580,1190 h46
  text "DAT" at -210,1130 h46
  text "PWR" at 235,1130 h46
Bottom Overlay:
  text "'.Layer_Name'" at -300,1775 h120
  text "'.ProjectTitle'" at 875,1325 h90
  text "'.ProjectRevisionFAB'" at 125,1225 h90
  text "Rev" at 300,1225 h90
  text "'.ProjectBoardNumber'" at 615,1225 h90
  text "219-04-" at 900,1225 h90
Top Paste:
  text "'.Layer_Name'" at -300,1775 h120
Top Solder:
  text "'.Layer_Name'" at -300,1775 h120
Bottom Solder:
  text "'.Layer_Name'" at -302.63,1775 h120
BOARD (M2):
  the board outline again, w10
  text "'.Layer_Name'" at -302.63,1775 h120
FAB (M4):
  lines w10: 10990.28,1282.4 11050.28,1282.4 ; 10990.28,1342.4 11050.28,1342.4 ; 11020.28,1312.4 11020.28,1372.4 ; 8180.28,217.76 8180.28,367.76 8330.28,367.76 8330.28,217.76 8180.28,217.76 ; 8180.28,438.62 8330.28,438.62 8330.28,588.62 8180.28,588.62 8180.28,438.62 ; 8180.28,655.16 8180.28,805.16 8330.28,805.16 8330.28,655.16 8180.28,655.16 ; 8180.28,863.03 8330.28,863.03 8330.28,1013.03 8180.28,1013.03 8180.28,863.03 ; 8180.28,1825.24 8330.28,1825.24 8330.28,1975.24 8180.28,1975.24 8180.28,1825.24 ; 8583.43,-1126.34 9349.21,-1126.34 9349.21,-976.34 8583.43,-976.34 8583.43,-1126.34 ; 8980.28,-126.34 8980.28,23.66 11480.28,23.66 11480.28,-126.34 8980.28,-126.34 ; 9280.28,1825.24 9280.28,1975.24 9430.28,1975.24 9430.28,1825.24 9280.28,1825.24 ; 9380.28,-626.34 9380.28,-476.34 11480.28,-476.34 11480.28,-626.34 9380.28,-626.34 ; 9380.28,-376.34 11480.28,-376.34 11480.28,-226.34 9380.28,-226.34 9380.28,-376.34 ; 10175.98,1059.88 10175.98,1209.88 10325.98,1209.88 10325.98,1059.88 10175.98,1059.88 ; 10180.28,1252.4 10180.28,1402.4 10530.28,1402.4 10530.28,1252.4 10180.28,1252.4 ; 10180.28,1443.35 10180.28,1593.35 10530.28,1593.35 10530.28,1443.35 10180.28,1443.35 ; 10180.28,1634.29 10530.28,1634.29 10530.28,1784.29 10180.28,1784.29 10180.28,1634.29 ; 10180.28,1825.24 10180.28,1975.24 10330.28,1975.24 10330.28,1825.24 10180.28,1825.24 ; 10523.98,-1126.34 10523.98,-976.34 10675,-976.34 10675,-1126.34 10523.98,-1126.34 ; 10845.28,1059.88 10995.28,1059.88 10995.28,1209.88 10845.28,1209.88 10845.28,1059.88 ; 11080.28,1252.4 11430.28,1252.4 11430.28,1402.4 11080.28,1402.4 11080.28,1252.4
  text "THIS PCB TO BE MANUFACTURED TO MEET ALL ACCEPTANCE LEVELS" at 7380.28,2368.39 h70
  text "OF A CLASS 2 PCB PER ANSI/IPC-A-600G." at 7380.28,2218.39 h70
  text "FR-4 or Equivalent" at 8180.28,2036.5 h70
  text "MATERIAL:" at 7575,2035 h70
  text "CONTROLLED IMPEDANCE" at 10392.52,1869.88 h70
  text "MULTILAYER" at 8405.28,1865.24 h70
  text "2" at 9330.28,1865.24 h70
  text "LAYERS" at 9505.28,1865.24 h70
  text "Cu WEIGHT EXTERNAL LAYERS" at 8180.28,1674.29 h70
  text "1OZ" at 10230.28,1674.29 h70
  text "FINISHED" at 10605.28,1674.29 h70
  text "Cu WEIGHT INTERNAL LAYERS" at 8180.28,1483.35 h70
  text "N/A" at 10230.28,1483.35 h70
  text "FINISHED" at 10605.28,1483.35 h70
  text "0.063" at 10225,1295 h70
  text "FINISHED OVERALL THICKNESS" at 8180.28,1292.4 h70
  text "in" at 10605.28,1292.4 h70
  text "10" at 11180.28,1292.4 h70
  text "%" at 11505.28,1292.4 h70
  text "COPPER THIEVING ALLOWED" at 8187.8,1102.17 h70
  text "YES" at 10431.89,1102.17 h70
  text "NO" at 11101.18,1102.17 h70
  text "X" at 10888.23,1082.48 h102.36
  text "LEAD-FREE HOT AIR LEVELING" at 8404.33,913.19 h70
  text "FINISH:" at 7575,905 h70
  text "IMMERSION GOLD" at 8405.28,695.16 h70
  text "X" at 8220,680 h102.36
  text "IMMERSION TIN" at 8405.28,478.62 h70
  text "SMOBC WITH SELECTIVE GOLD PLATING ON LANDS" at 8405.28,332.76 h70
  text "INDICATED. 1um GOLD OVER 5-10 um NICKEL" at 8405.28,182.76 h70
  text "SOLDERMASK" at 8180.28,-86.34 h70
  text "DYNACHEM EPIC 200 LPI OR EQUIVALENT" at 9030.28,-86.34 h70
  text "SOLDERMASK COLOR" at 8180.28,-336.34 h70
  text "RED" at 9430.28,-336.34 h70
  text "SILKSCREEN COLOR" at 8180.28,-586.34 h70
  text "WHITE" at 9430.28,-586.34 h70
  text "ALL HOLES TO BE LOCATED BY THE COORDINATES FROM THE NC DRILL DATA PROVIDED." at 7380.28,-836.34 h70
  text "PCB REV" at 10057.87,-1082.87 h70
  text "219-05-" at 8620,-1085 h70
  text ".ProjectBoardNumber" at 9080,-1085 h70
  text ".ProjectRevisionART" at 10570,-1085 h70
  text "USE ARTWORK SET NO." at 7380.28,-1086.34 h70
  text "ALL UL LOGO, MANUFACTURER'S ID, AND DATE CODES SHALL BE PLACED" at 7380.28,-1336.34 h70
  text "ON THE BOTTOM SIDE UNLESS OTHERWISE INDICATED." at 7380.28,-1486.34 h70
  text "ANY ALTERNATIVES TO THE ABOVE SPECIFICATIONS MUST FIRST BE APPROVED." at 7361.02,-1693.11 h70
Crop Marks (M5):
  lines w50: -425,1225 -425,1025 -225,1025 ; -425,1475 -425,1675 -225,1675 ; -25,175 -25,-25 175,-25 ; 800,-25 910,-25 1025,90 1025,200 ; 1225,1025 1425,1025 1425,1225 ; 1225,1675 1425,1675 1425,1475
  text "219-05-" at -475,1950 h120
  text "'.ProjectBoardNumber'" at 325,1950 h120
  text "REV" at 950,1950 h120
  text "'.ProjectRevisionART'" at 1375,1950 h120
Assy TOP (M11):
  lines w10: 7130,-3015 7255,-3015 7380,-3015 7255,-2845 7130,-3015
  text "ASSEMBLY NOTES:" at 7125,-2175 h80
  text "1. ALL COMPONENTS SHALL BE RoHS COMPLIANT." at 7225,-2320 h68
  text "2. ALL UNUSED THROUGH HOLE COMPONENT LOCATIONS SHALL BE FREE OF SOLDER." at 7214.96,-2439.17 h68
  text "3. ALL COMPONENTS SHALL BE MOUNTED FLUSH TO THE BOARD, EXCEPT AS NOTED." at 7214.96,-2557.28 h68
  text "4. FINISHED BOARD SHALL BE FREE OF ALL RESIDUES." at 7214.96,-2675.39 h68
  text "5. ALL LEADS SHALL BE TRIMMED TO A MAXIMUM HEIGHT OF 2mm" at 7214.96,-2793.5 h68
  text "6. PLACE LABEL  ON THE LOCATION INDICATED." at 7215,-2975 h68
  text "ASSEMBLY VARIANT:" at 8978.35,-3620.08 h32
  text ".variantName" at 9539.37,-3620.08 h32
  text "DOCUMENT NUMBER:" at 10799.21,-3944.88 h32
  text "219-02-" at 10780,-4070 h68
  text ".ProjectBoardNumber" at 11205,-4070 h68
  text "-D" at 11440,-4070 h68
  text "'.ProjectRevisionASSY'" at 11475,-4230 h70
TITLE (M16):
  lines w3.94: 8958.66,-3570.87 12179.92,-3570.87 ; 11202.76,-3275.59 11202.76,-3393.7 12179.92,-3393.7 ; 11735.83,-4245.47 11735.83,-4195.47 ; 11735.83,-4220.47 12135.83,-4220.47 ; 11742.13,-4173.23 11742.13,-4133.86 ; 11742.13,-4153.54 12135.83,-4153.54 ; 11835.83,-4245.47 11835.83,-4195.47 ; 11935.83,-4245.47 11935.83,-4195.47 ; 11938.98,-4165.35 11938.98,-4141.73 ; 12035.83,-4245.47 12035.83,-4195.47 ; 12135.83,-4245.47 12135.83,-4195.47 ; 12135.83,-4173.23 12135.83,-4133.86 ; 12179.92,-3393.7 12179.92,-3393.7
  lines w5: -2620.08,-2101.38 -2420.08,-2101.38 ; -2620.08,273.62 -2420.08,273.62 ; -2620.08,2648.62 -2420.08,2648.62 ; -120.08,-4476.38 -120.08,-4276.38 ; -120.08,4823.62 -120.08,5023.62 ; 2379.92,-4476.38 2379.92,-4276.38 ; 2379.92,4823.62 2379.92,5023.62 ; 4879.92,-4476.38 4879.92,-4276.38 ; 4879.92,4823.62 4879.92,5023.62 ; 6279.92,-4276.38 7679.92,-4276.38 ; 7379.92,-4476.38 7379.92,-4276.38 ; 7379.92,4823.62 7379.92,5023.62 ; 7620.08,-4276.38 7620.08,-3275.59 12179.92,-3275.59 ; 8958.66,-4276.38 8958.66,-3275.59 ; 8958.66,-4102.36 12179.92,-4102.36 ; 8958.66,-3866.14 12179.92,-3866.14 ; 8958.66,-3629.92 12179.92,-3629.92 ; 9879.92,-4476.38 9879.92,-4276.38 ; 9879.92,4823.62 9879.92,5023.62 ; 10061.02,-4276.38 10061.02,-3629.92 ; 10769.69,-4102.36 10769.69,-3866.14 ; 11281.5,-4276.38 11281.5,-4102.36 ; 11576.77,-4276.38 11576.77,-3866.14 ; 12179.92,-3076.38 12179.92,-4276.38 ; 12179.92,-2101.38 12379.92,-2101.38 ; 12179.92,273.62 12379.92,273.62 ; 12179.92,2648.62 12379.92,2648.62 ; 12179.92,-4276.38 12179.92,4823.62 -2420.08,4823.62 -2420.08,-4276.38 12179.92,-4276.38 ; -2620.08,-4476.38 -2620.08,5023.62 12379.92,5023.62 12379.92,-4476.38 -2620.08,-4476.38
  lines w10: 7383.86,4814.96 7383.86,4637.8 ; 7816.93,4460.63 7816.93,4637.8 7816.93,4814.96 ; 8309.06,4460.63 8309.06,4637.8 8309.06,4814.96 ; 11399.61,4460.63 11399.61,4637.8 11399.61,4814.96 ; 12167.32,4460.63 7383.86,4460.63 7383.86,4637.8 ; 12167.32,4637.8 7383.86,4637.8
  text "1" at -1388.74,4893.62 h70
  text "2" at 1106.92,4893.62 h70
  text "3" at 3596.27,4893.62 h70
  text "4" at 6102.93,4893.62 h70
  text "5" at 8601.92,4893.62 h70
  text "6" at 11106.92,4893.62 h70
  text "REV" at 7482.28,4696.85 h60
  text "ECO" at 7875.98,4696.85 h60
  text "Comments" at 9706.69,4677.17 h60
  text "Date" at 11596.46,4677.17 h60
  text "A" at -2545.08,3750.62 h70
  text "A" at 12254.92,3750.62 h70
  text "B" at -2545.08,1370.62 h70
  text "B" at 12254.92,1370.62 h70
  text "C" at -2545.08,-1004.38 h70
  text "C" at 12254.92,-1004.38 h70
  text "PART NUMBER:" at 11242.13,-3354.33 h39.37
  text ".ProjectpartNumber" at 11650,-3365 h59.06
  text "D" at -2545.08,-3374.38 h70
  text "TITLE:" at 8998.03,-3374.02 h45
  text "D" at 12254.92,-3374.38 h70
  text ".ProjectTitle" at 8998.03,-3531.5 h98.43
  text "PCB DESIGNER:" at 8998.03,-3708.66 h45
  text "GERBER FILE:" at 10100.39,-3708.66 h45
  text ".ProjectDrawnBy" at 8998.03,-3826.77 h70
  text "M" at 7738.19,-3905.51 h600
  text "ENGINEER:" at 8998.03,-3944.88 h45
  text "BOARD NUMBER:" at 10100.39,-3944.88 h45
  text "DATE:" at 11624.02,-3944.88 h45
  text "Microchip Technology Inc." at 7689.76,-4033.86 h70
  text ".ProjectEngineer" at 8998.03,-4062.99 h70
  text "04-" at 10100.39,-4062.99 h70
  text ".ProjectBoardNumber" at 10297.24,-4062.99 h70
  text ".PRINT_DATE" at 11624.02,-4062.99 h59.06
  text "2355 W. Chandler Blvd." at 7738.19,-4141.73 h70
  text "LAYER NAME:" at 10100.39,-4161.42 h45
  text "10mm" at 11596.46,-4165.35 h27.56
  text "PCB FILE NAME:" at 8998.03,-4171.26 h45
  text "REV:" at 11311.02,-4171.26 h45
  text "400mil" at 11592.52,-4232.28 h27.56
  text "Chandler, AZ  85224" at 7777.56,-4240.16 h70
  text ".PCB_FILE_NAME_NO_PATH" at 8998.03,-4250 h45
  text "1" at -1388.74,-4406.38 h70
  text "2" at 1106.92,-4406.38 h70
  text "3" at 3596.27,-4406.38 h70
  text "4" at 6102.93,-4406.38 h70
  text "5" at 8601.92,-4406.38 h70
  text "6" at 11106.92,-4406.38 h70
Drill Drawing:
  circle w10: c-751.18,-3166.67 r33.33
  lines w10: -844.3,-3695 2670.78,-3695 ; -844.3,-2645 2670.78,-2645 ; -293.43,-3845 -293.43,-2495 ; 246.44,-3845 246.44,-2495 ; 1386.1,-3845 1386.1,-2495 ; 1891.98,-3845 1891.98,-2495 ; -844.3,-3845 2670.78,-3845 2670.78,-2495 -844.3,-2495 -844.3,-3845 ; -784.51,-3650 -751.18,-3633.33 -717.84,-3650 -734.51,-3616.67 -717.84,-3583.33 -751.18,-3600 -784.51,-3583.33 -767.84,-3616.67 -784.51,-3650 ; -784.51,-3500 -717.84,-3500 -717.84,-3433.33 -784.51,-3433.33 -784.51,-3500 ; -784.51,-3333.33 -767.84,-3333.33 -751.18,-3350 -734.51,-3333.33 -717.84,-3333.33 -734.51,-3316.67 -717.84,-3300 -734.51,-3300 -751.18,-3283.33 -767.84,-3300 -784.51,-3300 -767.84,-3316.67 -784.51,-3333.33 ; -784.51,-3033.33 -767.84,-3033.33 -767.84,-3050 -734.51,-3050 -734.51,-3033.33 -717.84,-3033.33 -717.84,-3000 -734.51,-3000 -734.51,-2983.33 -767.84,-2983.33 -767.84,-3000 -784.51,-3000 -784.51,-3033.33 ; -784.51,-2833.33 -717.84,-2833.33 -751.18,-2900 -784.51,-2833.33 ; -784.51,-2716.67 -751.18,-2750 -717.84,-2716.67 -751.18,-2683.33 -784.51,-2716.67
  text "Symbol" at -754.3,-2600 h72
  text "Count" at -248.43,-2600 h72
  text "Hole Size" at 291.44,-2600 h72
  text "Plated" at 1431.1,-2600 h72
  text "Hole Type" at 1936.98,-2600 h72
  text "6" at -248.43,-2750 h60
  text "12.00mil (0.305mm)" at 291.44,-2750 h60
  text "PTH" at 1431.1,-2750 h60
  text "Round" at 1936.98,-2750 h60
  text "2" at -248.43,-2900 h60
  text "33.47mil (0.850mm)" at 291.44,-2900 h60
  text "PTH" at 1431.1,-2900 h60
  text "Round" at 1936.98,-2900 h60
  text "16" at -248.43,-3050 h60
  text "38.00mil (0.965mm)" at 291.44,-3050 h60
  text "PTH" at 1431.1,-3050 h60
  text "Round" at 1936.98,-3050 h60
  text "3" at -248.43,-3200 h60
  text "42.00mil (1.067mm)" at 291.44,-3200 h60
  text "PTH" at 1431.1,-3200 h60
  text "Round" at 1936.98,-3200 h60
  text "2" at -248.43,-3350 h60
  text "45.28mil (1.150mm)" at 291.44,-3350 h60
  text "PTH" at 1431.1,-3350 h60
  text "Round" at 1936.98,-3350 h60
  text "6" at -248.43,-3500 h60
  text "47.24mil (1.200mm)" at 291.44,-3500 h60
  text "PTH" at 1431.1,-3500 h60
  text "Round" at 1936.98,-3500 h60
  text "2" at -248.43,-3650 h60
  text "110.00mil (2.794mm)" at 291.44,-3650 h60
  text "NPTH" at 1431.1,-3650 h60
  text "Round" at 1936.98,-3650 h60
  text "37 Total" at -248.43,-3800 h60
  text "DOCUMENT NUMBER:" at 10799.21,-3944.88 h45
  text "219-04-" at 10830,-4065 h68
  text ".ProjectBoardNumber" at 11270,-4065 h68
  text "'.ProjectRevisionFAB'" at 11470,-4230 h70

## Dimensions
0,0 to -400,1050 on Drill Drawing
0,0 to -400,1050 on Drill Drawing

## Text inside footprints (layer, text, board x,y; h text height)
C2: Guard TOP (M15) "C" at 637.87,1136.81 h23.62 r180
J4: Assy TOP (M11) "1" at 1245,1435 h30; Assy TOP (M11) "PCB EDGE" at 1063.78,1659.93 h30
LOGO1: Bottom Overlay "R" at 413,1174 h20
R4: Assy TOP (M11) "1" at 338.58,630.32 h30
U1: Assy TOP (M11) "1" at 574.21,940.95 h19.68 r90